# Altium PCB AICat V1.7 双面板 板厚1.6mm.PcbDoc (part 3 of 6)
Units mil, origin at the board's own origin, x right, y up, seen from the top; angles counter-clockwise.
Board outline 2778 x 2104 mil, 2 copper layers (Top Layer, Bottom Layer); 123 components, 84 nets, 332 pads, 255 vias.
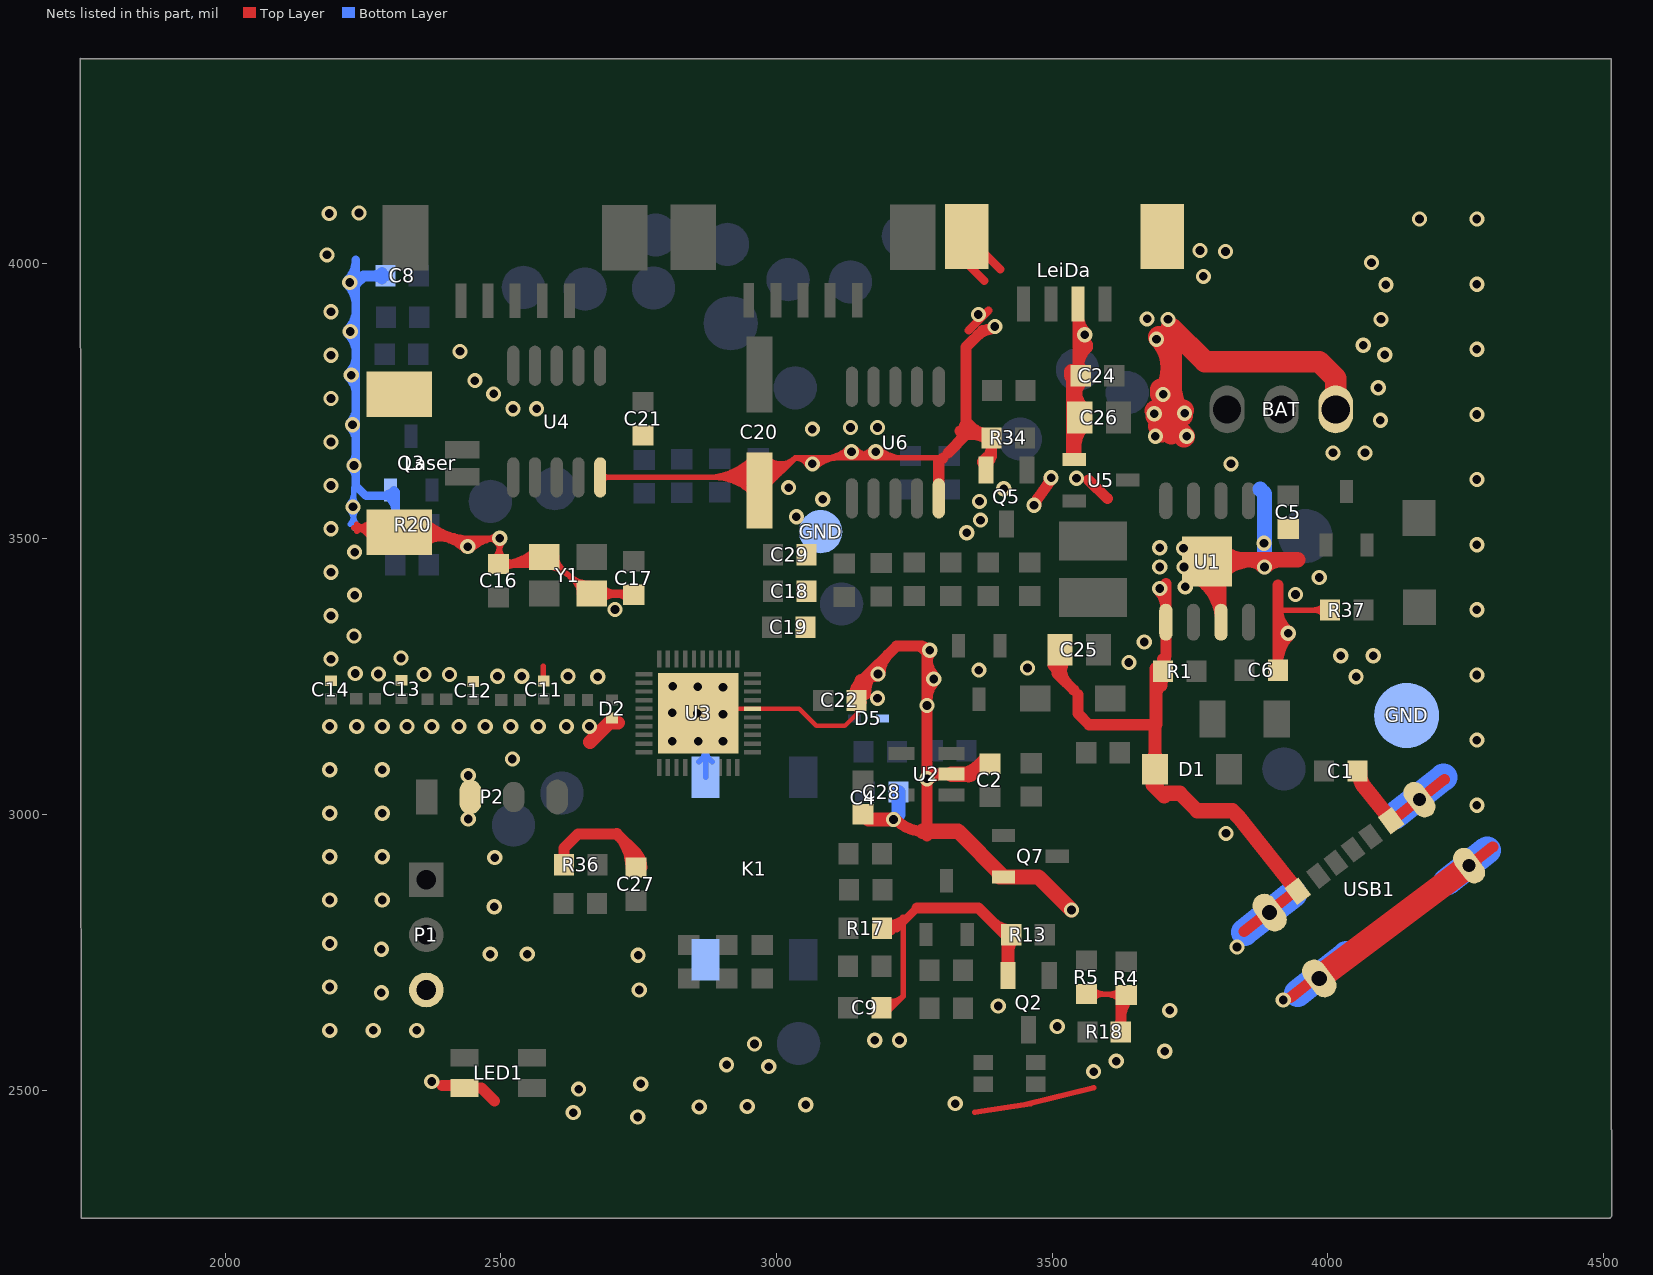
[diagram p3: the nets of this part, all layers, seen from the top]

## Via types
v1: diameter 27.56, hole 15.75, Top Layer to Bottom Layer, tented both sides, 255 vias

## Nets (pads, with @x,y where several pads share a name; then routed paths per layer and width w, separated by ;. In a path a pad name is that pad's centre, name@x,y a point inside that pad or via, vN(x,y) a via of type N, cw(c..) or ccw(c..) an arc to the next point about the centre after c; other vN are vias at no path point) (continued)
GND: BAT.1 C1.1 C2.1 C4.1 C5.2 C6.1 C8.2 C9.1 C11.1 C12.1 C13.1 C14.1 C16.1 C17.1 C18.2 C19.2 C20.2 C21.1 C22.1 C24.1 C25.2 C26.2 C27.1 C28.1 C29.1 D1.1 D2.2 D5.2 GND.1 K1.1 K1.2 Laser.3 Laser.4 LED1.1 LeiDa.2 LeiDa.5 LeiDa.6 P1.4 P2.2 Q2.2 Q3.2 Q5.2 Q7.2 R1.1 R4.2 R5.2 R13.1 R17.2 R18.1 R20.1 R34.1 R36.2 R37.1 U1.1 U1.3 U1.9 U2.2 U3.16 U3.41 U4.5 U5.1 U6.5 USB1.7 USB1.A12 USB1.B12 Y1.2 Y1.4 | length 31279.2
  Top Layer w8: U3.41@2925.8,3188.59 2928.99,3191.78 U3.16@2956.55,3191.78 3041.22,3191.78 3072,3161 3124,3161 3146.65,3183.65 3146.65,3202.34 C22.1@3151.32,3207 ; C22.1@3141.34,3195.76 cw(c3129.08,3183.17) 3146.65,3183.17 cw(c3155.58,3183.17) C22.1@3153.94,3191.95 ; C22.1@3153.32,3217 C22.1@3153.32,3192.32 ; 3146.65,3183.61 ccw(c3137.1,3183.61) 3140.39,3192.58 cw(c3137.1,3183.61) 3146.65,3183.61 ; 3146.65,3183.61 cw(c3158.18,3183.61) 3152.44,3193.61 ccw(c3158.18,3183.61) 3146.65,3183.61 ; C22.1@3153.32,3192.32 cw(c3165.79,3192.32) 3159.98,3203.36 ccw(c3165.79,3192.32) C22.1@3153.32,3192.32 ; C22.1@3153.32,3192.32 ccw(c3140.84,3192.32) 3146.65,3203.36 cw(c3140.84,3192.32) C22.1@3153.32,3192.32
  Top Layer w10: 2382.59,3501 cw(c2382.59,3428.59) v1@2433.79,3479.79 ; 2406.73,3501 cw(c2406.73,3452.73) v1@2440.86,3486.86 ; 2430.88,3501 cw(c2430.88,3476.88) v1@2447.93,3493.93 ; v1@2432.07,3493.93 cw(c2449.12,3476.88) 2449.12,3501 ; v1@2439.14,3486.86 cw(c2473.27,3452.73) 2473.27,3501 ; v1@2446.21,3479.79 cw(c2497.41,3428.59) v1@2497.41,3501 ; C16.1@2496,3454.32 2498,3456.32 v1(2498,3501) 2326.92,3501 Laser.4@2315.91,3512.01 2307.92,3520 2233,3520 ; C11.1@2577.43,3242.54 2577.43,3269.12 ; Y1.4@2578.56,3467.55 2589.45,3467.55 2656.38,3400.62 Y1.2@2665.18,3400.62 ; U4.5@2680.2,3611.52 2953.25,3611.52 2968.9,3595.86 2982.86,3595.86 3034,3647 ; C9.1@3206,2647 3230,2671 ; 3230,2805.84 3230,2671 ; 3311.14,3656.14 3302,3647 3034,3647 ; 3359.4,2460.2 3460.85,2475.65 ; 3453.3,2474.6 3575.1,2504.6 ; R5.2@3562,2674.68 3632,2674.68 R4.2@3634,2672.68 ; 3909.32,3370 3910.32,3371 R37.1@4003.69,3371 ; 2233,3520 cw(c2233,3486.23) Laser.4@2264.4,3498.65 ; 2233,3520 ccw(c2233,3572.81) Laser.4@2271.62,3536.79 ; 2233,3520 cw(c2233,3486.23) Laser.4@2264.4,3498.65 ; 2233,3520 ccw(c2233,3572.81) Laser.4@2271.62,3536.79 ; 2233,3520 ccw(c2233,3572.81) Laser.4@2271.62,3536.79 ; 2233,3520 cw(c2233,3486.23) Laser.4@2264.4,3498.65 ; 2233,3520 ccw(c2233,3572.81) Laser.4@2271.62,3536.79 ; 2233,3520 cw(c2233,3486.23) Laser.4@2264.4,3498.65 ; 2233,3520 ccw(c2233,3572.81) Laser.4@2271.62,3536.79 ; 2233,3520 cw(c2233,3486.23) Laser.4@2264.4,3498.65 ; 2247.71,3520 cw(c2247.71,3492.05) Laser.4@2273.7,3502.32 ; 2247.71,3520 cw(c2247.71,3492.05) Laser.4@2273.7,3502.32 ; 2247.71,3520 cw(c2247.71,3492.05) Laser.4@2273.7,3502.32 ; 2247.71,3520 cw(c2247.71,3492.05) Laser.4@2273.7,3502.32 ; 2247.71,3520 cw(c2247.71,3492.05) Laser.4@2273.7,3502.32 ; 2254.2,3520 cw(c2254.2,3541.2) 2239.21,3526.21 ccw(c2254.2,3541.2) 2254.2,3520 ; 2254.2,3520 ccw(c2254.2,3498.8) 2239.21,3513.79 cw(c2254.2,3498.8) 2254.2,3520 ; 2256.01,3520 ccw(c2256.01,3551.36) Laser.4@2278.94,3529.97 ; 2256.01,3520 ccw(c2256.01,3551.36) Laser.4@2278.94,3529.97 ; 2256.01,3520 ccw(c2256.01,3551.36) Laser.4@2278.94,3529.97 ; 2256.01,3520 ccw(c2256.01,3551.36) Laser.4@2278.94,3529.97 ; 2256.01,3520 ccw(c2256.01,3551.36) Laser.4@2278.94,3529.97 ; Laser.4@2338.11,3516.49 ccw(c2375.5,3553.88) 2375.5,3501 ; Laser.4@2338.11,3516.49 ccw(c2375.5,3553.88) 2375.5,3501 ; Laser.4@2338.11,3516.49 ccw(c2375.5,3553.88) 2375.5,3501 ; Laser.4@2338.11,3516.49 ccw(c2375.5,3553.88) 2375.5,3501 ; Laser.4@2338.11,3516.49 ccw(c2375.5,3553.88) 2375.5,3501 ; Laser.4@2345.18,3523.56 ccw(c2399.64,3578.02) 2399.64,3501 ; Laser.4@2345.18,3523.56 ccw(c2399.64,3578.02) 2399.64,3501 ; Laser.4@2345.18,3523.56 ccw(c2399.64,3578.02) 2399.64,3501 ; Laser.4@2345.18,3523.56 ccw(c2399.64,3578.02) 2399.64,3501 ; Laser.4@2345.18,3523.56 ccw(c2399.64,3578.02) 2399.64,3501 ; Laser.4@2352.26,3530.63 ccw(c2423.79,3602.16) 2423.79,3501 ; Laser.4@2352.26,3530.63 ccw(c2423.79,3602.16) 2423.79,3501 ; Laser.4@2352.26,3530.63 ccw(c2423.79,3602.16) 2423.79,3501 ; Laser.4@2352.26,3530.63 ccw(c2423.79,3602.16) 2423.79,3501 ; Laser.4@2352.26,3530.63 ccw(c2423.79,3602.16) 2423.79,3501 ; Laser.4@2359.33,3486.31 cw(c2394.79,3450.84) 2394.79,3501 ; Laser.4@2359.33,3486.31 cw(c2394.79,3450.84) 2394.79,3501 ; Laser.4@2359.33,3486.31 cw(c2394.79,3450.84) 2394.79,3501 ; Laser.4@2359.33,3486.31 cw(c2394.79,3450.84) 2394.79,3501 ; Laser.4@2359.33,3486.31 cw(c2394.79,3450.84) 2394.79,3501 ; Laser.4@2359.33,3537.7 ccw(c2447.93,3626.3) 2447.93,3501 ; Laser.4@2359.33,3537.7 ccw(c2447.93,3626.3) 2447.93,3501 ; Laser.4@2359.33,3537.7 ccw(c2447.93,3626.3) 2447.93,3501 ; Laser.4@2359.33,3537.7 ccw(c2447.93,3626.3) 2447.93,3501 ; Laser.4@2359.33,3537.7 ccw(c2447.93,3626.3) 2447.93,3501 ; 2476.8,3501 cw(c2476.8,3479.8) v1@2491.79,3494.79 ; 2476.8,3501 ccw(c2476.8,3522.2) v1@2491.79,3507.21 ; 2476.8,3501 cw(c2476.8,3479.8) v1@2491.79,3494.79 ; 2476.8,3501 ccw(c2476.8,3522.2) v1@2491.79,3507.21 ; 2476.8,3501 ccw(c2476.8,3522.2) v1@2491.79,3507.21 ; 2476.8,3501 cw(c2476.8,3479.8) v1@2491.79,3494.79 ; 2476.8,3501 ccw(c2476.8,3522.2) v1@2491.79,3507.21 ; 2476.8,3501 cw(c2476.8,3479.8) v1@2491.79,3494.79 ; 2476.8,3501 ccw(c2476.8,3522.2) v1@2491.79,3507.21 ; 2476.8,3501 cw(c2476.8,3479.8) v1@2491.79,3494.79 ; C16.1@2487.57,3463.73 ccw(c2462.41,3488.89) v1@2498,3488.89 ; C16.1@2487.57,3463.73 ccw(c2462.41,3488.89) v1@2498,3488.89 ; C16.1@2487.57,3463.73 ccw(c2462.41,3488.89) v1@2498,3488.89 ; C16.1@2487.57,3463.73 ccw(c2462.41,3488.89) v1@2498,3488.89 ; C16.1@2487.57,3463.73 ccw(c2462.41,3488.89) v1@2498,3488.89 ; v1@2491.79,3494.79 cw(c2476.8,3479.8) 2498,3479.8 ; v1@2491.79,3494.79 cw(c2476.8,3479.8) 2498,3479.8 ; v1@2491.79,3494.79 cw(c2476.8,3479.8) 2498,3479.8 ; v1@2491.79,3494.79 cw(c2476.8,3479.8) 2498,3479.8 ; v1@2491.79,3494.79 cw(c2476.8,3479.8) 2498,3479.8 ; 2498,3479.8 cw(c2519.2,3479.8) v1@2504.21,3494.79 ; 2498,3479.8 cw(c2519.2,3479.8) v1@2504.21,3494.79 ; 2498,3479.8 cw(c2519.2,3479.8) v1@2504.21,3494.79 ; 2498,3479.8 cw(c2519.2,3479.8) v1@2504.21,3494.79 ; 2498,3479.8 cw(c2519.2,3479.8) v1@2504.21,3494.79 ; 2498,3483.99 ccw(c2526.66,3483.99) C16.1@2506.39,3463.73 ; 2498,3483.99 ccw(c2526.66,3483.99) C16.1@2506.39,3463.73 ; 2498,3483.99 ccw(c2526.66,3483.99) C16.1@2506.39,3463.73 ; 2498,3483.99 ccw(c2526.66,3483.99) C16.1@2506.39,3463.73 ; 2498,3483.99 ccw(c2526.66,3483.99) C16.1@2506.39,3463.73 ; Y1.4@2582.49,3448.93 cw(c2582.49,3387.16) 2626.16,3430.84 ; Y1.4@2582.49,3448.93 cw(c2582.49,3387.16) 2626.16,3430.84 ; Y1.4@2582.49,3448.93 cw(c2582.49,3387.16) 2626.16,3430.84 ; Y1.4@2582.49,3448.93 cw(c2582.49,3387.16) 2626.16,3430.84 ; Y1.4@2582.49,3448.93 cw(c2582.49,3387.16) 2626.16,3430.84 ; Y1.4@2582.49,3458.93 cw(c2582.49,3421.31) 2609.09,3447.91 ; Y1.4@2582.49,3458.93 cw(c2582.49,3421.31) 2609.09,3447.91 ; Y1.4@2582.49,3458.93 cw(c2582.49,3421.31) 2609.09,3447.91 ; Y1.4@2582.49,3458.93 cw(c2582.49,3421.31) 2609.09,3447.91 ; Y1.4@2582.49,3458.93 cw(c2582.49,3421.31) 2609.09,3447.91 ; Y1.4@2601.12,3467.55 ccw(c2629.27,3467.55) 2609.36,3447.64 ; Y1.4@2601.12,3467.55 ccw(c2629.27,3467.55) 2609.36,3447.64 ; Y1.4@2601.12,3467.55 ccw(c2629.27,3467.55) 2609.36,3447.64 ; Y1.4@2601.12,3467.55 ccw(c2629.27,3467.55) 2609.36,3447.64 ; Y1.4@2601.12,3467.55 ccw(c2629.27,3467.55) 2609.36,3447.64 ; 2621.16,3435.84 ccw(c2661.24,3475.92) Y1.2@2661.24,3419.24 ; 2621.16,3435.84 ccw(c2661.24,3475.92) Y1.2@2661.24,3419.24 ; 2621.16,3435.84 ccw(c2661.24,3475.92) Y1.2@2661.24,3419.24 ; 2621.16,3435.84 ccw(c2661.24,3475.92) Y1.2@2661.24,3419.24 ; 2621.16,3435.84 ccw(c2661.24,3475.92) Y1.2@2661.24,3419.24 ; 2632.88,3424.12 cw(c2609.38,3400.62) Y1.2@2642.62,3400.62 ; 2632.88,3424.12 cw(c2609.38,3400.62) Y1.2@2642.62,3400.62 ; 2632.88,3424.12 cw(c2609.38,3400.62) Y1.2@2642.62,3400.62 ; 2632.88,3424.12 cw(c2609.38,3400.62) Y1.2@2642.62,3400.62 ; 2632.88,3424.12 cw(c2609.38,3400.62) Y1.2@2642.62,3400.62 ; Y1.2@2638.23,3418.77 ccw(c2661.24,3441.78) Y1.2@2661.24,3409.24 ; Y1.2@2638.23,3418.77 ccw(c2661.24,3441.78) Y1.2@2661.24,3409.24 ; Y1.2@2638.23,3418.77 ccw(c2661.24,3441.78) Y1.2@2661.24,3409.24 ; Y1.2@2638.23,3418.77 ccw(c2661.24,3441.78) Y1.2@2661.24,3409.24 ; Y1.2@2638.23,3418.77 ccw(c2661.24,3441.78) Y1.2@2661.24,3409.24 ; U4.5@2684.46,3607.26 cw(c2694.74,3596.97) 2694.74,3611.52 ; U4.5@2684.46,3607.26 cw(c2694.74,3596.97) 2694.74,3611.52 ; U4.5@2684.46,3607.26 cw(c2694.74,3596.97) 2694.74,3611.52 ; U4.5@2684.46,3607.26 cw(c2694.74,3596.97) 2694.74,3611.52 ; U4.5@2684.46,3607.26 cw(c2694.74,3596.97) 2694.74,3611.52 ; U4.5@2684.46,3615.77 ccw(c2694.74,3626.06) 2694.74,3611.52 ; U4.5@2684.46,3615.77 ccw(c2694.74,3626.06) 2694.74,3611.52 ; U4.5@2684.46,3615.77 ccw(c2694.74,3626.06) 2694.74,3611.52 ; U4.5@2684.46,3615.77 ccw(c2694.74,3626.06) 2694.74,3611.52 ; U4.5@2684.46,3615.77 ccw(c2694.74,3626.06) 2694.74,3611.52 ; 2886.15,3611.52 cw(c2886.15,3513.12) C20.2@2955.73,3582.69 ; 2886.15,3611.52 cw(c2886.15,3513.12) C20.2@2955.73,3582.69 ; 2886.15,3611.52 cw(c2886.15,3513.12) C20.2@2955.73,3582.69 ; 2910.3,3611.52 cw(c2910.3,3537.26) C20.2@2962.8,3589.77 ; 2910.3,3611.52 cw(c2910.3,3537.26) C20.2@2962.8,3589.77 ; 2910.3,3611.52 cw(c2910.3,3537.26) C20.2@2962.8,3589.77 ; 2934.44,3611.52 cw(c2934.44,3561.4) C20.2@2969.87,3596.84 ; 2934.44,3611.52 cw(c2934.44,3561.4) C20.2@2969.87,3596.84 ; 2934.44,3611.52 cw(c2934.44,3561.4) C20.2@2969.87,3596.84 ; 3034,3647 cw(c3034,3621.6) v1@3057.04,3632.3 ; 3034,3647 cw(c3034,3621.6) v1@3057.04,3632.3 ; 3034,3647 cw(c3007.68,3673.32) 2981.83,3646.54 ccw(c3007.68,3673.32) 3034,3647 ; 3034,3647 cw(c3034,3621.6) v1@3057.04,3632.3 ; 3034,3647 cw(c3034,3621.6) v1@3057.04,3632.3 ; 3049.67,3647 cw(c3049.67,3628.88) v1@3066.11,3636.51 ; 3049.67,3647 cw(c3049.67,3628.88) v1@3066.11,3636.51 ; 3049.67,3647 cw(c3049.67,3628.88) v1@3066.11,3636.51 ; 3049.67,3647 cw(c3049.67,3628.88) v1@3066.11,3636.51 ; v1@3064.14,3636.86 cw(c3088.61,3612.39) 3088.61,3647 ; v1@3064.14,3636.86 cw(c3088.61,3612.39) 3088.61,3647 ; v1@3064.14,3636.86 cw(c3088.61,3612.39) 3088.61,3647 ; v1@3064.14,3636.86 cw(c3088.61,3612.39) 3088.61,3647 ; v1@3071.21,3629.79 cw(c3112.75,3588.25) 3112.75,3647 ; v1@3071.21,3629.79 cw(c3112.75,3588.25) 3112.75,3647 ; v1@3071.21,3629.79 cw(c3112.75,3588.25) 3112.75,3647 ; v1@3071.21,3629.79 cw(c3112.75,3588.25) 3112.75,3647 ; 3088.25,3647 ccw(c3088.25,3705.75) v1@3129.79,3664.21 ; 3088.25,3647 ccw(c3088.25,3705.75) v1@3129.79,3664.21 ; 3088.25,3647 ccw(c3088.25,3705.75) v1@3129.79,3664.21 ; 3088.25,3647 ccw(c3088.25,3705.75) v1@3129.79,3664.21 ; 3112.39,3647 ccw(c3112.39,3681.61) v1@3136.86,3657.14 ; 3112.39,3647 ccw(c3112.39,3681.61) v1@3136.86,3657.14 ; 3112.39,3647 ccw(c3112.39,3681.61) v1@3136.86,3657.14 ; 3112.39,3647 ccw(c3112.39,3681.61) v1@3136.86,3657.14 ; v1@3132.25,3647 ccw(c3132.25,3705.75) v1@3173.79,3664.21 ; v1@3132.25,3647 ccw(c3132.25,3705.75) v1@3173.79,3664.21 ; v1@3132.25,3647 ccw(c3132.25,3705.75) v1@3173.79,3664.21 ; v1@3132.25,3647 ccw(c3132.25,3705.75) v1@3173.79,3664.21 ; v1@3135.14,3657.14 ccw(c3159.61,3681.61) 3159.61,3647 ; v1@3135.14,3657.14 ccw(c3159.61,3681.61) 3159.61,3647 ; v1@3135.14,3657.14 ccw(c3159.61,3681.61) 3159.61,3647 ; v1@3135.14,3657.14 ccw(c3159.61,3681.61) 3159.61,3647 ; v1@3142.21,3664.21 ccw(c3183.75,3705.75) v1@3183.75,3647 ; v1@3142.21,3664.21 ccw(c3183.75,3705.75) v1@3183.75,3647 ; v1@3142.21,3664.21 ccw(c3183.75,3705.75) v1@3183.75,3647 ; v1@3142.21,3664.21 ccw(c3183.75,3705.75) v1@3183.75,3647 ; 3156.39,3647 ccw(c3156.39,3681.61) v1@3180.86,3657.14 ; 3156.39,3647 ccw(c3156.39,3681.61) v1@3180.86,3657.14 ; 3156.39,3647 ccw(c3156.39,3681.61) v1@3180.86,3657.14 ; 3156.39,3647 ccw(c3156.39,3681.61) v1@3180.86,3657.14 ; v1@3179.14,3657.14 ccw(c3203.61,3681.61) 3203.61,3647 ; v1@3179.14,3657.14 ccw(c3203.61,3681.61) 3203.61,3647 ; v1@3179.14,3657.14 ccw(c3203.61,3681.61) 3203.61,3647 ; v1@3179.14,3657.14 ccw(c3203.61,3681.61) 3203.61,3647 ; v1@3186.21,3664.21 ccw(c3227.75,3705.75) 3227.75,3647 ; v1@3186.21,3664.21 ccw(c3227.75,3705.75) 3227.75,3647 ; v1@3186.21,3664.21 ccw(c3227.75,3705.75) 3227.75,3647 ; v1@3186.21,3664.21 ccw(c3227.75,3705.75) 3227.75,3647 ; 3230,2671 cw(c3202.84,2698.15) 3193.54,2660.89 ccw(c3202.84,2698.15) 3230,2671 ; 3230,2671 cw(c3205.47,2695.53) 3194.52,2662.61 ccw(c3205.47,2695.53) 3230,2671 ; R5.2@3572.39,2665.27 cw(c3595.11,2642.56) 3595.11,2674.68 ; R5.2@3572.39,2665.27 cw(c3595.11,2642.56) 3595.11,2674.68 ; R5.2@3572.39,2665.27 cw(c3595.11,2642.56) 3595.11,2674.68 ; R5.2@3572.39,2665.27 cw(c3595.11,2642.56) 3595.11,2674.68 ; R5.2@3572.39,2665.27 cw(c3595.11,2642.56) 3595.11,2674.68 ; R5.2@3572.39,2684.09 ccw(c3595.11,2706.81) 3595.11,2674.68 ; R5.2@3572.39,2684.09 ccw(c3595.11,2706.81) 3595.11,2674.68 ; R5.2@3572.39,2684.09 ccw(c3595.11,2706.81) 3595.11,2674.68 ; R5.2@3572.39,2684.09 ccw(c3595.11,2706.81) 3595.11,2674.68 ; R5.2@3572.39,2684.09 ccw(c3595.11,2706.81) 3595.11,2674.68 ; 3596.06,2674.68 cw(c3596.06,2635.73) R4.2@3623.61,2663.27 ; 3596.06,2674.68 cw(c3596.06,2635.73) R4.2@3623.61,2663.27 ; 3596.06,2674.68 cw(c3596.06,2635.73) R4.2@3623.61,2663.27 ; 3596.06,2674.68 cw(c3596.06,2635.73) R4.2@3623.61,2663.27 ; 3596.06,2674.68 cw(c3596.06,2635.73) R4.2@3623.61,2663.27 ; 3605.72,2674.68 ccw(c3605.72,2699.98) R4.2@3623.61,2682.09 ; 3605.72,2674.68 ccw(c3605.72,2699.98) R4.2@3623.61,2682.09 ; 3605.72,2674.68 ccw(c3605.72,2699.98) R4.2@3623.61,2682.09 ; 3605.72,2674.68 ccw(c3605.72,2699.98) R4.2@3623.61,2682.09 ; 3605.72,2674.68 ccw(c3605.72,2699.98) R4.2@3623.61,2682.09 ; 3971.56,3371 cw(c3971.56,3338.87) R37.1@3994.28,3361.59 ; 3971.56,3371 ccw(c3971.56,3403.13) R37.1@3994.28,3380.41 ; 3971.56,3371 ccw(c3971.56,3403.13) R37.1@3994.28,3380.41 ; 3971.56,3371 cw(c3971.56,3338.87) R37.1@3994.28,3361.59 ; 3971.56,3371 ccw(c3971.56,3403.13) R37.1@3994.28,3380.41 ; 3971.56,3371 cw(c3971.56,3338.87) R37.1@3994.28,3361.59 ; 2871.74,3611.52 ccw(c2871.74,3730.3) 2955.73,3646.31 cw(c2871.74,3730.3) 2871.74,3611.52 ; 2895.88,3611.52 ccw(c2895.88,3706.15) 2962.8,3639.23 cw(c2895.88,3706.15) 2895.88,3611.52 ; 2920.03,3611.52 ccw(c2920.03,3682.01) 2969.87,3632.16 cw(c2920.03,3682.01) 2920.03,3611.52 ; 2944.17,3611.52 ccw(c2944.17,3657.87) 2976.95,3625.09 cw(c2944.17,3657.87) 2944.17,3611.52 ; C20.2@2947.11,3610.56 ccw(c2972.33,3636.69) 2998.01,3611.01 cw(c2972.33,3636.69) C20.2@2947.11,3610.56 ; C20.2@2954.05,3617.76 ccw(c2979.4,3644.02) 3005.21,3618.21 cw(c2979.4,3644.02) C20.2@2954.05,3617.76 ; C20.2@2961,3624.95 ccw(c2986.47,3651.34) 3012.41,3625.41 cw(c2986.47,3651.34) C20.2@2961,3624.95 ; C20.2@2967.94,3632.15 ccw(c2993.54,3658.67) 3019.6,3632.6 cw(c2993.54,3658.67) C20.2@2967.94,3632.15 ; C20.2@2974.89,3639.34 ccw(c3000.61,3665.99) 3026.8,3639.8 cw(c3000.61,3665.99) C20.2@2974.89,3639.34 ; C9.1@3191.12,2651.19 ccw(c3197.85,2678.16) 3217.51,2658.51 cw(c3197.85,2678.16) C9.1@3191.12,2651.19 ; C9.1@3191.36,2653.12 ccw(c3199.75,2678.35) 3218.55,2659.55 cw(c3199.75,2678.35) C9.1@3191.36,2653.12
  Top Layer w15: C16.1@2496,3454.32 2565.32,3454.32 Y1.4@2578.56,3467.55 ; Y1.2@2665.18,3400.62 2739.07,3400.62 C17.1@2741,3398.68 ; R17.2@3191.32,2794 3218.16,2794 3230,2805.84 3255.16,2831 ; LeiDa.6@3340.6,4004.1 3376.6,3968.1 ; 3348.4,3878 3384.4,3914 ; LeiDa.6@3369.6,4025.1 3405.6,3989.1 ; C25.2@3508.96,3280 C25.2@3508.96,3287 ; C16.1@2503.75,3454.32 ccw(c2503.75,3538.41) Y1.4@2563.22,3478.95 ; C16.1@2503.75,3454.32 ccw(c2503.75,3538.41) Y1.4@2563.22,3478.95 ; C16.1@2503.75,3454.32 ccw(c2503.75,3538.41) Y1.4@2563.22,3478.95 ; C16.1@2503.75,3454.32 ccw(c2503.75,3538.41) Y1.4@2563.22,3478.95 ; C16.1@2503.75,3454.32 ccw(c2503.75,3538.41) Y1.4@2563.22,3478.95 ; C16.1@2504.63,3446.67 cw(c2523.07,3428.23) 2523.07,3454.32 ; C16.1@2504.63,3446.67 cw(c2523.07,3428.23) 2523.07,3454.32 ; C16.1@2504.63,3446.67 cw(c2523.07,3428.23) 2523.07,3454.32 ; C16.1@2504.63,3446.67 cw(c2523.07,3428.23) 2523.07,3454.32 ; C16.1@2504.63,3446.67 cw(c2523.07,3428.23) 2523.07,3454.32 ; C16.1@2504.63,3461.96 ccw(c2523.07,3480.41) 2523.07,3454.32 ; C16.1@2504.63,3461.96 ccw(c2523.07,3480.41) 2523.07,3454.32 ; C16.1@2504.63,3461.96 ccw(c2523.07,3480.41) 2523.07,3454.32 ; C16.1@2504.63,3461.96 ccw(c2523.07,3480.41) 2523.07,3454.32 ; C16.1@2504.63,3461.96 ccw(c2523.07,3480.41) 2523.07,3454.32 ; 2539.97,3454.32 ccw(c2539.97,3502.2) Y1.4@2573.83,3468.34 ; 2539.97,3454.32 ccw(c2539.97,3502.2) Y1.4@2573.83,3468.34 ; 2539.97,3454.32 ccw(c2539.97,3502.2) Y1.4@2573.83,3468.34 ; 2539.97,3454.32 ccw(c2539.97,3502.2) Y1.4@2573.83,3468.34 ; 2539.97,3454.32 ccw(c2539.97,3502.2) Y1.4@2573.83,3468.34 ; Y1.2@2680.51,3389.22 cw(c2708.03,3361.7) 2708.03,3400.62 ; Y1.2@2680.51,3389.22 cw(c2708.03,3361.7) 2708.03,3400.62 ; Y1.2@2680.51,3389.22 cw(c2708.03,3361.7) 2708.03,3400.62 ; Y1.2@2680.51,3389.22 cw(c2708.03,3361.7) 2708.03,3400.62 ; Y1.2@2680.51,3389.22 cw(c2708.03,3361.7) 2708.03,3400.62 ; Y1.2@2680.51,3412.02 ccw(c2708.03,3439.54) 2708.03,3400.62 ; Y1.2@2680.51,3412.02 ccw(c2708.03,3439.54) 2708.03,3400.62 ; Y1.2@2680.51,3412.02 ccw(c2708.03,3439.54) 2708.03,3400.62 ; Y1.2@2680.51,3412.02 ccw(c2708.03,3439.54) 2708.03,3400.62 ; Y1.2@2680.51,3412.02 ccw(c2708.03,3439.54) 2708.03,3400.62 ; 2709.26,3400.62 cw(c2709.26,3367.93) C17.1@2732.37,3391.04 ; 2709.26,3400.62 cw(c2709.26,3367.93) C17.1@2732.37,3391.04 ; 2709.26,3400.62 cw(c2709.26,3367.93) C17.1@2732.37,3391.04 ; 2709.26,3400.62 cw(c2709.26,3367.93) C17.1@2732.37,3391.04 ; 2709.26,3400.62 cw(c2709.26,3367.93) C17.1@2732.37,3391.04 ; 2718.59,3400.62 ccw(c2718.59,3420.11) C17.1@2732.37,3406.33 ; 2718.59,3400.62 ccw(c2718.59,3420.11) C17.1@2732.37,3406.33 ; 2718.59,3400.62 ccw(c2718.59,3420.11) C17.1@2732.37,3406.33 ; 2718.59,3400.62 ccw(c2718.59,3420.11) C17.1@2732.37,3406.33 ; 2718.59,3400.62 ccw(c2718.59,3420.11) C17.1@2732.37,3406.33 ; 3229.47,2811.47 cw(c3204.16,2836.78) 3194.29,2802.37 ccw(c3204.16,2836.78) 3229.47,2811.47 ; 3229.47,2811.47 cw(c3206.6,2834.34) 3195.14,2804.09 ccw(c3206.6,2834.34) 3229.47,2811.47 ; R17.2@3189.83,2790.06 ccw(c3197.58,2810.53) 3213.05,2795.05 cw(c3197.58,2810.53) R17.2@3189.83,2790.06 ; R17.2@3190.16,2787.95 ccw(c3196.14,2808.79) 3211.46,2793.46 cw(c3196.14,2808.79) R17.2@3190.16,2787.95
  Top Layer w20: 2393.84,2509.13 2429.43,2509.13 LED1.1@2434.43,2504.13 2464.97,2504.13 2488.6,2480.5 ; R36.2@2614.68,2909 2614.68,2939.68 2640,2965 2711,2965 2745,2931 C27.1@2745,2904.32 ; 3153.32,3243.32 3155.32,3243.32 3218,3306 3261,3306 ; R17.2@3191.32,2791 R17.2@3207,2791 ; 3255.16,2831 3366,2831 3415,2782 R13.1@3425.69,2782 ; 3273,2961 3273,2969.96 3273,2978 ; 3274,2979 3273,2978 ; v1@3274,3075 v1@3276,3073 ; v1@3276.33,3073.33 U2.2@3317.17,3073.33 ; U6.5@3294.2,3573.52 3294.2,3639.2 3302,3647 ; 3311.14,3656.14 3344,3689 ; 3374,3878 3344,3848 3344,3689 ; Q5.2@3379.6,3629.21 3379.6,3641.21 3389.69,3651.3 ; 3474,3574 v1@3497,3606 ; C25.2@3508.96,3287 3508.96,3256.04 ; C25.2@3520.48,3275.23 ccw(c3549.23,3261.09) 3526.57,3238.43 ; 3539,3226 3508.96,3256.04 ; 3546.61,3830.95 cw(c3598.05,3830.95) v1@3561.67,3867.33 ; 3546.61,3860.76 ccw(c3549.76,3860.76) 3547.53,3858.53 ; 3546.61,3879.24 cw(c3549.76,3879.24) 3547.53,3881.47 ; LeiDa.2@3546.61,3909.05 ccw(c3598.05,3909.05) v1@3561.67,3872.67 ; LeiDa.2@3546.61,3929.98 3546.61,3801.08 C24.1@3551.68,3796 ; 3547,3218 3547,3183 3567,3163 3688,3163 ; 3566.08,3606.82 3600.08,3572.82 ; R18.1@3624.31,2606 3624.31,2663 R4.2@3634,2672.68 ; 3700.37,3282 3706,3287.63 ; U1.1@3706,3372 U1.1@3706,3349 ; 3706,3419 U1.1@3706,3349 ; U1.9@3781,3459 3806,3434 U1.3@3806,3349 ; 3847.55,2787.89 USB1.B12@3935.6,2857.4 ; C6.1@3909.32,3262 3909.32,3370 ; 3909.32,3416.32 3909.32,3370 ; v1@3932.02,2668.23 4020.07,2737.73 ; USB1.A12@4123.61,2994.53 4211.66,3064.03 ; 4210.7,2871.98 4298.75,2941.48 ; R36.2@2608.81,2915.86 ccw(c2594.63,2930.04) 2614.68,2930.04 ; R36.2@2608.81,2915.86 ccw(c2594.63,2930.04) 2614.68,2930.04 ; R36.2@2608.81,2915.86 ccw(c2594.63,2930.04) 2614.68,2930.04 ; R36.2@2608.81,2915.86 ccw(c2594.63,2930.04) 2614.68,2930.04 ; 2614.68,2930.04 ccw(c2634.74,2930.04) R36.2@2620.56,2915.86 ; 2614.68,2930.04 ccw(c2634.74,2930.04) R36.2@2620.56,2915.86 ; 2614.68,2930.04 ccw(c2634.74,2930.04) R36.2@2620.56,2915.86 ; 2614.68,2930.04 ccw(c2634.74,2930.04) R36.2@2620.56,2915.86 ; 2710.27,2965.73 cw(c2648.86,2904.32) C27.1@2735.71,2904.32 ; 2710.27,2965.73 cw(c2648.86,2904.32) C27.1@2735.71,2904.32 ; 2710.27,2965.73 cw(c2648.86,2904.32) C27.1@2735.71,2904.32 ; 2710.27,2965.73 cw(c2648.86,2904.32) C27.1@2735.71,2904.32 ; C27.1@2739.13,2910.19 ccw(c2724.94,2924.37) 2745,2924.37 ; C27.1@2739.13,2910.19 ccw(c2724.94,2924.37) 2745,2924.37 ; C27.1@2739.13,2910.19 ccw(c2724.94,2924.37) 2745,2924.37 ; C27.1@2739.13,2910.19 ccw(c2724.94,2924.37) 2745,2924.37 ; 2744.41,2931.59 cw(c2717.14,2904.32) C27.1@2755.71,2904.32 ; 2744.41,2931.59 cw(c2717.14,2904.32) C27.1@2755.71,2904.32 ; 2744.41,2931.59 cw(c2717.14,2904.32) C27.1@2755.71,2904.32 ; 2744.41,2931.59 cw(c2717.14,2904.32) C27.1@2755.71,2904.32 ; 2745,2924.37 ccw(c2765.06,2924.37) C27.1@2750.87,2910.19 ; 2745,2924.37 ccw(c2765.06,2924.37) C27.1@2750.87,2910.19 ; 2745,2924.37 ccw(c2765.06,2924.37) C27.1@2750.87,2910.19 ; 2745,2924.37 ccw(c2765.06,2924.37) C27.1@2750.87,2910.19 ; 3249.56,3306 cw(c3249.56,3269.56) v1@3275.33,3295.33 ; 3249.56,3306 cw(c3249.56,3269.56) v1@3275.33,3295.33 ; 3249.56,3306 cw(c3249.56,3269.56) v1@3275.33,3295.33 ; 3249.56,3306 cw(c3249.56,3269.56) v1@3275.33,3295.33 ; 3261,3306 cw(c3261,3291.62) v1@3274.46,3296.67 ; 3261,3306 cw(c3261,3291.62) v1@3274.46,3296.67 ; 3261,3306 cw(c3261,3291.62) v1@3274.46,3296.67 ; 3261,3306 cw(c3261,3291.62) v1@3274.46,3296.67 ; 3261,3306 3273,3294 v1(3273,3198) v1(3273,3065) 3273,2978 ; 3264.96,2969.96 cw(c3264.96,3035.09) 3214.9,2993.42 ccw(c3264.96,3035.09) 3264.96,2969.96 ; 3264.96,2969.96 3273,2978 ; v1@3273,3207.9 cw(c3323.1,3207.9) v1@3287.67,3243.33 ; v1@3273,3207.9 cw(c3323.1,3207.9) v1@3287.67,3243.33 ; v1@3273,3207.9 cw(c3323.1,3207.9) v1@3287.67,3243.33 ; 3273,3235.81 ccw(c3274.81,3235.81) 3273.53,3234.53 ; 3273,3235.81 ccw(c3274.81,3235.81) 3273.53,3234.53 ; 3273,3235.81 ccw(c3274.81,3235.81) 3273.53,3234.53 ; 3273,3256.19 cw(c3274.81,3256.19) 3273.53,3257.47 ; 3273,3256.19 cw(c3274.81,3256.19) 3273.53,3257.47 ; 3273,3256.19 cw(c3274.81,3256.19) 3273.53,3257.47 ; 3273,3276.8 cw(c3299.2,3276.8) v1@3280.67,3295.33 ; 3273,3276.8 cw(c3299.2,3276.8) v1@3280.67,3295.33 ; 3273,3276.8 cw(c3299.2,3276.8) v1@3280.67,3295.33 ; 3273,3276.8 cw(c3299.2,3276.8) v1@3280.67,3295.33 ; 3273,3284.1 ccw(c3323.1,3284.1) v1@3287.67,3248.67 ; 3273,3284.1 ccw(c3323.1,3284.1) v1@3287.67,3248.67 ; 3273,3284.1 ccw(c3323.1,3284.1) v1@3287.67,3248.67 ; v1@3275.67,3062.33 cw(c3302.23,3035.77) U2.2@3302.23,3073.33 ; v1@3275.67,3062.33 cw(c3302.23,3035.77) U2.2@3302.23,3073.33 ; v1@3275.67,3062.33 cw(c3302.23,3035.77) U2.2@3302.23,3073.33 ; 3327.23,3672.23 ccw(c3293.47,3706) 3341.22,3706 ; 3327.23,3672.23 ccw(c3293.47,3706) 3341.22,3706 ; 3327.23,3672.23 ccw(c3293.47,3706) 3341.22,3706 ; 3332.6,3695.55 ccw(c3346.68,3707.41) 3346.68,3689 ; 3332.6,3695.55 ccw(c3346.68,3707.41) 3346.68,3689 ; 3332.6,3695.55 ccw(c3346.68,3707.41) 3346.68,3689 ; 3344,3689 R34.1@3389.69,3689 ; 3347.89,3708.44 ccw(c3389.68,3743.65) R34.1@3389.68,3689 ; 3347.89,3708.44 ccw(c3389.68,3743.65) R34.1@3389.68,3689 ; 3347.89,3708.44 ccw(c3389.68,3743.65) R34.1@3389.68,3689 ; 3357.52,3689 cw(c3357.52,3651.82) R34.1@3383.81,3678.11 ; 3357.52,3689 cw(c3357.52,3651.82) R34.1@3383.81,3678.11 ; 3357.52,3689 cw(c3357.52,3651.82) R34.1@3383.81,3678.11 ; 3357.52,3689 cw(c3357.52,3651.82) R34.1@3383.81,3678.11 ; 3357.52,3689 cw(c3357.52,3651.82) R34.1@3383.81,3678.11 ; Q5.2@3376.93,3638.71 ccw(c3346.12,3669.52) R34.1@3389.69,3669.52 ; Q5.2@3376.93,3638.71 ccw(c3346.12,3669.52) R34.1@3389.69,3669.52 ; Q5.2@3376.93,3638.71 ccw(c3346.12,3669.52) R34.1@3389.69,3669.52 ; Q5.2@3376.93,3638.71 ccw(c3346.12,3669.52) R34.1@3389.69,3669.52 ; Q5.2@3376.93,3638.71 ccw(c3346.12,3669.52) R34.1@3389.69,3669.52 ; Q5.2@3379.24,3639.8 ccw(c3378.14,3651.3) 3389.69,3651.3 ; Q5.2@3379.24,3639.8 ccw(c3378.14,3651.3) 3389.69,3651.3 ; Q5.2@3379.24,3639.8 ccw(c3378.14,3651.3) 3389.69,3651.3 ; Q5.2@3379.24,3639.8 ccw(c3378.14,3651.3) 3389.69,3651.3 ; Q5.2@3379.24,3639.8 ccw(c3378.14,3651.3) 3389.69,3651.3 ; Q5.2@3383.38,3636.04 cw(c3404.91,3636.07) 3389.69,3651.3 ; Q5.2@3383.38,3636.04 cw(c3404.91,3636.07) 3389.69,3651.3 ; Q5.2@3383.38,3636.04 cw(c3404.91,3636.07) 3389.69,3651.3 ; Q5.2@3383.38,3636.04 cw(c3404.91,3636.07) 3389.69,3651.3 ; Q5.2@3383.38,3636.04 cw(c3404.91,3636.07) 3389.69,3651.3 ; R34.1@3383.81,3676.14 cw(c3369.63,3661.96) 3389.69,3661.96 ; R34.1@3383.81,3676.14 cw(c3369.63,3661.96) 3389.69,3661.96 ; R34.1@3383.81,3676.14 cw(c3369.63,3661.96) 3389.69,3661.96 ; R34.1@3383.81,3676.14 cw(c3369.63,3661.96) 3389.69,3661.96 ; R34.1@3383.81,3676.14 cw(c3369.63,3661.96) 3389.69,3661.96 ; 3389.69,3651.3 R34.1@3389.69,3689 ; 3389.69,3661.96 cw(c3409.74,3661.96) R34.1@3395.56,3676.14 ; 3389.69,3661.96 cw(c3409.74,3661.96) R34.1@3395.56,3676.14 ; 3389.69,3661.96 cw(c3409.74,3661.96) R34.1@3395.56,3676.14 ; 3389.69,3661.96 cw(c3409.74,3661.96) R34.1@3395.56,3676.14 ; 3389.69,3661.96 cw(c3409.74,3661.96) R34.1@3395.56,3676.14 ; 3391.58,2805.42 ccw(c3425.69,2839.52) R13.1@3425.69,2791.29 ; 3391.58,2805.42 ccw(c3425.69,2839.52) R13.1@3425.69,2791.29 ; 3391.58,2805.42 ccw(c3425.69,2839.52) R13.1@3425.69,2791.29 ; 3391.58,2805.42 ccw(c3425.69,2839.52) R13.1@3425.69,2791.29 ; 3508.96,3255.7 cw(c3543.83,3255.7) C25.2@3522,3282.89 ; 3508.96,3255.7 cw(c3543.83,3255.7) C25.2@3522,3282.89 ; 3508.96,3255.7 cw(c3543.83,3255.7) C25.2@3522,3282.89 ; 3508.96,3255.7 cw(c3543.83,3255.7) C25.2@3522,3282.89 ; 3508.96,3256.04 ccw(c3491.31,3256.04) 3501.53,3270.43 cw(c3491.31,3256.04) 3508.96,3256.04 ; 3508.96,3256.04 cw(c3526.61,3256.04) 3516.39,3270.43 ccw(c3526.61,3256.04) 3508.96,3256.04 ; C24.1@3546.61,3806.12 cw(c3604.88,3806.12) 3563.67,3847.33 ; C24.1@3546.61,3806.12 cw(c3604.88,3806.12) 3563.67,3847.33 ; C24.1@3546.61,3806.12 cw(c3604.88,3806.12) 3563.67,3847.33 ; 3546.61,3829.3 ccw(c3584,3829.3) C24.1@3557.56,3802.86 ; 3546.61,3829.3 ccw(c3584,3829.3) C24.1@3557.56,3802.86 ; 3546.61,3829.3 ccw(c3584,3829.3) C24.1@3557.56,3802.86 ; 3546.61,3829.3 ccw(c3584,3829.3) C24.1@3557.56,3802.86 ; 3546.61,3829.3 ccw(c3584,3829.3) C24.1@3557.56,3802.86 ; 3546.61,3845.59 ccw(c3556.59,3845.59) 3549.53,3838.53 ; 3546.61,3845.59 ccw(c3556.59,3845.59) 3549.53,3838.53 ; 3546.61,3845.59 ccw(c3556.59,3845.59) 3549.53,3838.53 ; 3546.61,3854.41 cw(c3556.59,3854.41) v1@3549.53,3861.47 ; 3546.61,3854.41 cw(c3556.59,3854.41) v1@3549.53,3861.47 ; 3546.61,3854.41 cw(c3556.59,3854.41) v1@3549.53,3861.47 ; 3546.61,3893.88 ccw(c3604.88,3893.88) 3563.67,3852.67 ; 3546.61,3893.88 ccw(c3604.88,3893.88) 3563.67,3852.67 ; 3546.61,3893.88 ccw(c3604.88,3893.88) 3563.67,3852.67 ; 3624.31,2627.04 ccw(c3644.37,2627.04) 3630.19,2612.86 cw(c3644.37,2627.04) 3624.31,2627.04 ; 3624.31,2627.04 cw(c3604.26,2627.04) 3618.44,2612.86 ccw(c3604.26,2627.04) 3624.31,2627.04 ; v1@3692.33,3407.33 cw(c3659.32,3374.32) U1.1@3706,3374.32 ; v1@3692.33,3407.33 cw(c3659.32,3374.32) U1.1@3706,3374.32 ; v1@3692.33,3407.33 cw(c3659.32,3374.32) U1.1@3706,3374.32 ; v1@3692.33,3407.33 cw(c3659.32,3374.32) U1.1@3706,3374.32 ; R1.1@3694.81,3266.86 ccw(c3667.8,3293.87) 3706,3293.87 ; R1.1@3694.81,3266.86 ccw(c3667.8,3293.87) 3706,3293.87 ; R1.1@3694.81,3266.86 ccw(c3667.8,3293.87) 3706,3293.87 ; R1.1@3694.81,3266.86 ccw(c3667.8,3293.87) 3706,3293.87 ; R1.1@3694.81,3266.86 ccw(c3667.8,3293.87) 3706,3293.87 ; R1.1@3695.82,3267.72 ccw(c3681.44,3287.63) 3706,3287.63 ; R1.1@3695.82,3267.72 ccw(c3681.44,3287.63) 3706,3287.63 ; R1.1@3695.82,3267.72 ccw(c3681.44,3287.63) 3706,3287.63 ; R1.1@3695.82,3267.72 ccw(c3681.44,3287.63) 3706,3287.63 ; R1.1@3695.82,3267.72 ccw(c3681.44,3287.63) 3706,3287.63 ; 3706,3287.63 U1.1@3706,3349 ; U1.9@3761.39,3429.67 cw(c3705.59,3346.2) U1.3@3806,3346.2 ; U1.9@3761.39,3429.67 cw(c3705.59,3346.2) U1.3@3806,3346.2 ; U1.9@3761.39,3429.67 cw(c3705.59,3346.2) U1.3@3806,3346.2 ; U1.9@3761.39,3429.67 cw(c3705.59,3346.2) U1.3@3806,3346.2 ; U1.9@3761.39,3429.67 cw(c3705.59,3346.2) U1.3@3806,3346.2 ; U1.9@3772.51,3446.3 cw(c3730.61,3383.63) 3806,3383.63 ; U1.9@3772.51,3446.3 cw(c3730.61,3383.63) 3806,3383.63 ; U1.9@3772.51,3446.3 cw(c3730.61,3383.63) 3806,3383.63 ; U1.9@3772.51,3446.3 cw(c3730.61,3383.63) 3806,3383.63 ; U1.9@3772.51,3446.3 cw(c3730.61,3383.63) 3806,3383.63 ; U1.9@3783.63,3462.93 cw(c3755.63,3421.06) U1.9@3806,3421.06 ; U1.9@3783.63,3462.93 cw(c3755.63,3421.06) U1.9@3806,3421.06 ; U1.9@3783.63,3462.93 cw(c3755.63,3421.06) U1.9@3806,3421.06 ; U1.9@3783.63,3462.93 cw(c3755.63,3421.06) U1.9@3806,3421.06 ; U1.9@3783.63,3462.93 cw(c3755.63,3421.06) U1.9@3806,3421.06 ; C6.1@3903.44,3268.86 ccw(c3889.26,3283.04) 3909.32,3283.04 ; C6.1@3903.44,3268.86 ccw(c3889.26,3283.04) 3909.32,3283.04 ; C6.1@3903.44,3268.86 ccw(c3889.26,3283.04) 3909.32,3283.04 ; C6.1@3903.44,3268.86 ccw(c3889.26,3283.04) 3909.32,3283.04 ; C6.1@3903.44,3268.86 ccw(c3889.26,3283.04) 3909.32,3283.04 ; 3909.32,3283.04 ccw(c3929.37,3283.04) C6.1@3915.19,3268.86 ; 3909.32,3283.04 ccw(c3929.37,3283.04) C6.1@3915.19,3268.86 ; 3909.32,3283.04 ccw(c3929.37,3283.04) C6.1@3915.19,3268.86 ; 3909.32,3283.04 ccw(c3929.37,3283.04) C6.1@3915.19,3268.86 ; 3909.32,3283.04 ccw(c3929.37,3283.04) C6.1@3915.19,3268.86 ; 3909.32,3370 ccw(c3954.18,3370) 3930.03,3332.19 cw(c3954.18,3370) 3909.32,3370 ; C22.1@3141.62,3217.98 cw(c3169.72,3217.98) 3149.85,3237.85 ccw(c3169.72,3217.98) C22.1@3141.62,3217.98 ; 3148.53,3236.53 cw(c3184,3201.05) 3184,3251.22 ccw(c3184,3201.05) 3148.53,3236.53 ; C22.1@3161.62,3217.98 cw(c3238.01,3217.98) 3184,3272 ccw(c3238.01,3217.98) C22.1@3161.62,3217.98 ; v1@3187.78,3255 cw(c3237.95,3255) 3202.47,3290.47 ccw(c3237.95,3255) v1@3187.78,3255 ; 3363.94,3867.94 cw(c3396,3835.88) 3396,3881.22 ccw(c3396,3835.88) 3363.94,3867.94 ; 3366.5,3870.5 cw(c3392.7,3844.3) 3395.69,3881.23 ccw(c3392.7,3844.3) 3366.5,3870.5 ; v1@3470.73,3561.61 cw(c3486.15,3564.13) 3473.46,3573.25 ccw(c3486.15,3564.13) v1@3470.73,3561.61 ; 3491.42,3598.23 ccw(c3478.17,3607.75) 3494.27,3610.39 cw(c3478.17,3607.75) 3491.42,3598.23 ; 3624.31,2631.62 cw(c3674.08,2631.62) 3638.89,2666.81 ccw(c3674.08,2631.62) 3624.31,2631.62 ; C6.1@3909.32,3274.77 cw(c3982.23,3274.77) 3930.67,3326.33 ccw(c3982.23,3274.77) C6.1@3909.32,3274.77 ; 3909.32,3323.05 cw(c3933.95,3323.05) 3916.53,3340.47 ccw(c3933.95,3323.05) 3909.32,3323.05 ; 3909.32,3333.5 ccw(c3930.87,3333.5) 3919.27,3315.33 cw(c3930.87,3333.5) 3909.32,3333.5
  Top Layer w23.62: C22.1@3146.72,3212.58 ccw(c3130.8,3228.5) 3153.32,3228.5 ; C22.1@3153.32,3217 3153.32,3243.32 ; 3351.42,3073.33 3376.4,3098.32 C2.1@3387,3098.32 ; Q2.2@3419.6,2708.21 3419.6,2775.91 R13.1@3425.69,2782 ; D1.1@3686,3092 3686,3163 ; 3688,3163 R1.1@3688,3265 ; U2.2@3328.98,3073.33 ccw(c3328.98,3127.49) 3367.28,3089.19 ; U2.2@3328.98,3073.33 ccw(c3328.98,3127.49) 3367.28,3089.19 ; U2.2@3328.98,3073.33 ccw(c3328.98,3127.49) 3367.28,3089.19 ; U2.2@3328.98,3073.33 ccw(c3328.98,3127.49) 3367.28,3089.19 ; U2.2@3328.98,3073.33 ccw(c3328.98,3127.49) 3367.28,3089.19 ; 3348.27,3070.19 cw(c3386.02,3032.44) C2.1@3386.02,3085.82 ; 3348.27,3070.19 cw(c3386.02,3032.44) C2.1@3386.02,3085.82 ; 3348.27,3070.19 cw(c3386.02,3032.44) C2.1@3386.02,3085.82 ; 3348.27,3070.19 cw(c3386.02,3032.44) C2.1@3386.02,3085.82 ; 3419.6,2750.64 cw(c3456.07,2750.64) R13.1@3430.28,2776.42 ; 3419.6,2750.64 cw(c3456.07,2750.64) R13.1@3430.28,2776.42 ; 3419.6,2750.64 cw(c3456.07,2750.64) R13.1@3430.28,2776.42 ; 3419.6,2750.64 cw(c3456.07,2750.64) R13.1@3430.28,2776.42 ; 3419.6,2750.64 cw(c3456.07,2750.64) R13.1@3430.28,2776.42 ; D1.1@3678.27,3094.66 ccw(c3659.61,3113.32) 3686,3113.32 ; D1.1@3678.27,3094.66 ccw(c3659.61,3113.32) 3686,3113.32 ; D1.1@3678.27,3094.66 ccw(c3659.61,3113.32) 3686,3113.32 ; 3686,3116.32 ccw(c3716.64,3116.32) D1.1@3694.97,3094.66 ; 3686,3116.32 ccw(c3716.64,3116.32) D1.1@3694.97,3094.66 ; 3686,3116.32 ccw(c3716.64,3116.32) D1.1@3694.97,3094.66 ; 3688,3212.71 cw(c3747,3212.71) R1.1@3705.28,3254.42 ; 3688,3212.71 cw(c3747,3212.71) R1.1@3705.28,3254.42 ; 3688,3212.71 cw(c3747,3212.71) R1.1@3705.28,3254.42 ; R1.1@3705.28,3254.42 ccw(c3725.27,3234.43) 3697,3234.43 cw(c3725.27,3234.43) R1.1@3705.28,3254.42 ; C22.1@3140.72,3212.58 ccw(c3110.32,3242.98) 3153.32,3242.98 cw(c3110.32,3242.98) C22.1@3140.72,3212.58
  Top Layer w25: 2661.56,3131.47 2696.81,3166.71 2712.7,3166.71 ; C4.1@3157,3000.68 3166.68,2991 v1(3212,2991)
  Top Layer w27.56: 3264.96,2969.96 3273,2969.96 3328.85,2969.96 Q7.2@3411.69,2887.12 3474.88,2887.12 v1(3535,2827) ; U2.2@3317.17,3073.33 3351.42,3073.33 ; Q5.2@3377.6,3639.21 Q5.2@3382.69,3644.3 ; C24.1@3534.68,3796 C24.1@3534.68,3803.68 ; U5.1@3539,3652.91 C24.1@3539,3794 ; D1.1@3682.62,3082.37 3682.62,3054.38 3703,3034 3707.77,3038.77 3731.23,3038.77 3763,3007 3826.6,3007 3836.7,2996.89 USB1.B12@3945.08,2860.76 ; U1.9@3812,3462 3945,3462 ; 4061.78,3055.42 USB1.A12@4114.89,2988.72 ; 3399.26,2899.55 cw(c3386.83,2887.12) Q7.2@3404.41,2887.12 ; 3399.26,2899.55 cw(c3386.83,2887.12) Q7.2@3404.41,2887.12 ; 3399.26,2899.55 cw(c3386.83,2887.12) Q7.2@3404.41,2887.12 ; 3539,3665.58 cw(c3598.28,3665.58) C26.2@3556.36,3707.49 ; 3539,3665.58 cw(c3598.28,3665.58) C26.2@3556.36,3707.49 ; 3539,3665.58 cw(c3598.28,3665.58) C26.2@3556.36,3707.49 ; 3539,3665.58 cw(c3598.28,3665.58) C26.2@3556.36,3707.49 ; 3539,3665.58 cw(c3598.28,3665.58) C26.2@3556.36,3707.49 ; 3539,3753.46 cw(c3593.24,3753.46) C24.1@3554.89,3791.81 ; 3539,3753.46 cw(c3593.24,3753.46) C24.1@3554.89,3791.81 ; 3539,3753.46 cw(c3593.24,3753.46) C24.1@3554.89,3791.81 ; 3539,3753.46 cw(c3593.24,3753.46) C24.1@3554.89,3791.81 ; 3539,3753.46 cw(c3593.24,3753.46) C24.1@3554.89,3791.81 ; 3539,3774.42 ccw(c3598.28,3774.42) C26.2@3556.36,3732.51 ; 3539,3774.42 ccw(c3598.28,3774.42) C26.2@3556.36,3732.51 ; 3539,3774.42 ccw(c3598.28,3774.42) C26.2@3556.36,3732.51 ; 3539,3774.42 ccw(c3598.28,3774.42) C26.2@3556.36,3732.51 ; 3539,3774.42 ccw(c3598.28,3774.42) C26.2@3556.36,3732.51 ; 3682.62,3054.05 cw(c3701.18,3054.05) D1.1@3691.67,3069.98 ; 3682.62,3054.05 cw(c3701.18,3054.05) D1.1@3691.67,3069.98 ; 3682.62,3054.05 cw(c3701.18,3054.05) D1.1@3691.67,3069.98 ; U1.9@3803.27,3436.73 cw(c3864.28,3375.72) 3864.28,3462 ; U1.9@3803.27,3436.73 cw(c3864.28,3375.72) 3864.28,3462 ; U1.9@3803.27,3436.73 cw(c3864.28,3375.72) 3864.28,3462 ; U1.9@3803.27,3436.73 cw(c3864.28,3375.72) 3864.28,3462 ; U1.9@3803.27,3436.73 cw(c3864.28,3375.72) 3864.28,3462 ; U1.9@3803.27,3481.27 ccw(c3849.8,3527.8) 3849.8,3462 ; U1.9@3803.27,3481.27 ccw(c3849.8,3527.8) 3849.8,3462 ; U1.9@3803.27,3481.27 ccw(c3849.8,3527.8) 3849.8,3462 ; U1.9@3803.27,3481.27 ccw(c3849.8,3527.8) 3849.8,3462 ; U1.9@3803.27,3481.27 ccw(c3849.8,3527.8) 3849.8,3462 ; v1(3885,3449) cw(c3916.38,3417.62) 3916.38,3462 ccw(c3916.38,3417.62) v1(3885,3449) ; v1(3885,3449) ccw(c3853.62,3417.62) 3853.62,3462 cw(c3853.62,3417.62) v1(3885,3449) ; C1.1@4057.81,3077.51 ccw(c4093.94,3073.4) 4065.5,3050.76 ; C1.1@4057.81,3077.51 ccw(c4093.94,3073.4) 4065.5,3050.76 ; C1.1@4057.81,3077.51 ccw(c4093.94,3073.4) 4065.5,3050.76
  Top Layer w39.37: 3693.03,3704.83 cw(c3700.29,3661.29) 3731.5,3692.5 ; v1@3697.18,3762.82 ccw(c3651.73,3808.27) 3716,3808.27 ; v1@3697.18,3771.18 cw(c3651.73,3725.73) 3716,3725.73 ; 3698.18,3694.82 ccw(c3655.14,3737.86) 3716,3737.86 ; 3716,3702.8 cw(c3763.2,3702.8) v1@3729.82,3736.18 ; 3716,3740.93 ccw(c3793.93,3740.93) v1@3738.82,3685.82 ; 3716,3761.2 ccw(c3763.2,3761.2) v1@3729.82,3727.82 ; 3722,3702 3716,3708 3716,3882 3777,3821 3984,3821 4013.9,3791.1 BAT.1@4013.9,3734.81 ; v1@3687.09,3732.52 cw(c3671.21,3690.64) 3716,3690.64 ; v1@3687.09,3732.52 cw(c3671.21,3690.64) 3716,3690.64 ; v1@3687.09,3732.52 cw(c3671.21,3690.64) 3716,3690.64 ; v1@3687.09,3732.52 cw(c3671.21,3690.64) 3716,3690.64 ; v1@3689.18,3722.82 ccw(c3624.42,3787.58) 3716,3787.58 ; v1@3689.18,3722.82 ccw(c3624.42,3787.58) 3716,3787.58 ; v1@3689.18,3722.82 ccw(c3624.42,3787.58) 3716,3787.58 ; v1@3689.18,3722.82 ccw(c3624.42,3787.58) 3716,3787.58 ; v1@3705.18,3757.82 ccw(c3679.04,3783.96) 3716,3783.96 ; v1@3705.18,3757.82 ccw(c3679.04,3783.96) 3716,3783.96 ; v1@3705.18,3757.82 ccw(c3679.04,3783.96) 3716,3783.96 ; v1@3705.18,3757.82 ccw(c3679.04,3783.96) 3716,3783.96 ; v1@3705.18,3766.18 cw(c3679.04,3740.04) 3716,3740.04 ; v1@3705.18,3766.18 cw(c3679.04,3740.04) 3716,3740.04 ; v1@3705.18,3766.18 cw(c3679.04,3740.04) 3716,3740.04 ; v1@3705.18,3766.18 cw(c3679.04,3740.04) 3716,3740.04 ; 3716,3696.76 cw(c3757.92,3696.76) v1@3737.06,3733.12 ; 3716,3696.76 cw(c3757.92,3696.76) v1@3737.06,3733.12 ; 3716,3696.76 cw(c3757.92,3696.76) v1@3737.06,3733.12 ; 3716,3696.76 cw(c3757.92,3696.76) v1@3737.06,3733.12 ; 3716,3771.68 ccw(c3783.68,3771.68) v1@3735.82,3723.82 ; 3716,3771.68 ccw(c3783.68,3771.68) v1@3735.82,3723.82 ; 3716,3771.68 ccw(c3783.68,3771.68) v1@3735.82,3723.82 ; 3716,3771.68 ccw(c3783.68,3771.68) v1@3735.82,3723.82 ; v1@3693.18,3866.18 cw(c3638.07,3811.07) 3716,3811.07 ccw(c3638.07,3811.07) v1@3693.18,3866.18
  Top Layer w45: USB1.7@3994.86,2711.62 USB1.7@4255.86,2907.62
  Bottom Layer w10: 2233,3520 2233,3593 2237,3597 ; v1(2858,3133) 2871.32,3119.68 ; K1.1@2871.32,3067.6 2871.32,3119.68 ; v1@2225.79,3551.79 cw(c2208.39,3534.39) 2233,3534.39 ; v1@2225.79,3551.79 cw(c2208.39,3534.39) 2233,3534.39 ; v1@2225.79,3551.79 cw(c2208.39,3534.39) 2233,3534.39 ; v1@2225.79,3564.21 ccw(c2208.39,3581.61) 2233,3581.61 ; v1@2225.79,3564.21 ccw(c2208.39,3581.61) 2233,3581.61 ; v1@2225.79,3564.21 ccw(c2208.39,3581.61) 2233,3581.61 ; 2233,3539.22 cw(c2250.78,3539.22) v1@2238.21,3551.79 ; 2233,3539.22 cw(c2250.78,3539.22) v1@2238.21,3551.79 ; 2233,3539.22 cw(c2250.78,3539.22) v1@2238.21,3551.79 ; 2233,3541.2 cw(c2211.8,3541.2) 2226.79,3526.21 ccw(c2211.8,3541.2) 2233,3541.2 ; 2233,3541.2 ccw(c2254.2,3541.2) 2239.21,3526.21 cw(c2254.2,3541.2) 2233,3541.2 ; 2233,3576.78 ccw(c2250.78,3576.78) v1@2238.21,3564.21 ; 2233,3576.78 ccw(c2250.78,3576.78) v1@2238.21,3564.21 ; 2233,3576.78 ccw(c2250.78,3576.78) v1@2238.21,3564.21 ; K1.1@2859.26,3096.1 ccw(c2842.24,3119.68) 2871.32,3119.68 ; K1.1@2859.26,3096.1 ccw(c2842.24,3119.68) 2871.32,3119.68 ; K1.1@2859.26,3096.1 ccw(c2842.24,3119.68) 2871.32,3119.68 ; K1.1@2859.26,3096.1 ccw(c2842.24,3119.68) 2871.32,3119.68 ; 2871.32,3119.68 ccw(c2900.4,3119.68) K1.1@2883.38,3096.1 ; 2871.32,3119.68 ccw(c2900.4,3119.68) K1.1@2883.38,3096.1 ; 2871.32,3119.68 ccw(c2900.4,3119.68) K1.1@2883.38,3096.1 ; 2871.32,3119.68 ccw(c2900.4,3119.68) K1.1@2883.38,3096.1
  Bottom Layer w15: 2286.23,3578 ccw(c2286.23,3593.33) Q3.2@2297.07,3582.49 ; Q3.2@2297.07,3576.39 cw(c2266.61,3545.93) 2309.69,3545.93 ; R20.1@2309.69,3526 2309.69,3585.12 2306.12,3588.69 2295.43,3578 2256,3578 2237,3597 2237,3963 2237,4006 ; v1@2222.56,3871.56 cw(c2187.7,3836.7) 2237,3836.7 ; v1@2222.56,3871.56 cw(c2187.7,3836.7) 2237,3836.7 ; v1@2222.56,3871.56 cw(c2187.7,3836.7) 2237,3836.7 ; v1@2222.56,3880.44 ccw(c2187.7,3915.3) 2237,3915.3 ; v1@2222.56,3880.44 ccw(c2187.7,3915.3) 2237,3915.3 ; v1@2222.56,3880.44 ccw(c2187.7,3915.3) 2237,3915.3 ; v1@2224.56,3792.56 cw(c2194.53,3762.53) 2237,3762.53 ; v1@2224.56,3792.56 cw(c2194.53,3762.53) 2237,3762.53 ; v1@2224.56,3792.56 cw(c2194.53,3762.53) 2237,3762.53 ; v1@2224.56,3801.44 ccw(c2194.53,3831.47) 2237,3831.47 ; v1@2224.56,3801.44 ccw(c2194.53,3831.47) 2237,3831.47 ; v1@2224.56,3801.44 ccw(c2194.53,3831.47) 2237,3831.47 ; v1@2226.56,3702.56 cw(c2201.35,3677.35) 2237,3677.35 ; v1@2226.56,3702.56 cw(c2201.35,3677.35) 2237,3677.35 ; v1@2226.56,3702.56 cw(c2201.35,3677.35) 2237,3677.35 ; v1@2226.56,3711.44 ccw(c2201.35,3736.65) 2237,3736.65 ; v1@2226.56,3711.44 ccw(c2201.35,3736.65) 2237,3736.65 ; v1@2226.56,3711.44 ccw(c2201.35,3736.65) 2237,3736.65 ; v1@2229.56,3628.56 cw(c2211.6,3610.6) 2237,3610.6 ; v1@2229.56,3628.56 cw(c2211.6,3610.6) 2237,3610.6 ; v1@2229.56,3628.56 cw(c2211.6,3610.6) 2237,3610.6 ; v1@2229.56,3637.44 ccw(c2211.6,3655.4) 2237,3655.4 ; v1@2229.56,3637.44 ccw(c2211.6,3655.4) 2237,3655.4 ; v1@2229.56,3637.44 ccw(c2211.6,3655.4) 2237,3655.4 ; 2237,4006 cw(c2186,4006) 2221.61,3969.49 ccw(c2186,4006) 2237,4006 ; Q3.2@2292.23,3578 ccw(c2292.23,3593.33) Q3.2@2303.07,3582.49 ; Q3.2@2292.23,3578 ccw(c2292.23,3593.33) Q3.2@2303.07,3582.49 ; Q3.2@2292.23,3578 ccw(c2292.23,3593.33) Q3.2@2303.07,3582.49 ; Q3.2@2292.23,3578 ccw(c2292.23,3593.33) Q3.2@2303.07,3582.49 ; R20.1@2302.04,3534.63 ccw(c2283.6,3553.07) 2309.69,3553.07 ; R20.1@2302.04,3534.63 ccw(c2283.6,3553.07) 2309.69,3553.07 ; R20.1@2302.04,3534.63 ccw(c2283.6,3553.07) 2309.69,3553.07 ; R20.1@2302.04,3534.63 ccw(c2283.6,3553.07) 2309.69,3553.07 ; R20.1@2302.04,3534.63 ccw(c2283.6,3553.07) 2309.69,3553.07 ; Q3.2@2303.07,3576.39 cw(c2287.1,3560.42) 2309.69,3560.42 ; Q3.2@2303.07,3576.39 cw(c2287.1,3560.42) 2309.69,3560.42 ; Q3.2@2303.07,3576.39 cw(c2287.1,3560.42) 2309.69,3560.42 ; Q3.2@2303.07,3576.39 cw(c2287.1,3560.42) 2309.69,3560.42 ; 2309.69,3553.07 ccw(c2335.78,3553.07) R20.1@2317.33,3534.63 ; 2309.69,3553.07 ccw(c2335.78,3553.07) R20.1@2317.33,3534.63 ; 2309.69,3553.07 ccw(c2335.78,3553.07) R20.1@2317.33,3534.63 ; 2309.69,3553.07 ccw(c2335.78,3553.07) R20.1@2317.33,3534.63 ; 2309.69,3553.07 ccw(c2335.78,3553.07) R20.1@2317.33,3534.63 ; v1@2221.56,3960.56 cw(c2184.28,3923.28) 2237,3923.28 ccw(c2184.28,3923.28) v1@2221.56,3960.56
  Bottom Layer w20: v1@2237,3963 2251,3977 ; C8.2@2290.69,3977 2251,3977 ; 2251,3977 cw(c2230.43,3997.57) 2226.51,3968.74 ccw(c2230.43,3997.57) 2251,3977 ; 2270.63,3977 cw(c2270.63,3956.94) C8.2@2284.81,3971.13 ; 2270.63,3977 ccw(c2270.63,3997.06) C8.2@2284.81,3982.87 ; 2270.63,3977 cw(c2270.63,3956.94) C8.2@2284.81,3971.13 ; 2270.63,3977 ccw(c2270.63,3997.06) C8.2@2284.81,3982.87 ; 2270.63,3977 ccw(c2270.63,3997.06) C8.2@2284.81,3982.87 ; 2270.63,3977 cw(c2270.63,3956.94) C8.2@2284.81,3971.13 ; 2270.63,3977 ccw(c2270.63,3997.06) C8.2@2284.81,3982.87 ; 2270.63,3977 cw(c2270.63,3956.94) C8.2@2284.81,3971.13
  Bottom Layer w25: v1(3212,2991) 3221.32,3000.32 C28.1@3221.32,3041
  Bottom Layer w27.56: 3877,3590 3885,3582 v1(3885,3449)
  Bottom Layer w50: 3848.79,2786.58 3936.84,2856.08 ; 3945.5,2676.4 4033.55,2745.91 ; 4121.45,2998.31 4209.5,3067.82 ; 4215.45,2877.96 4288.6,2935.7
  other v1: 2748.2,2451.8 2631.3,2459.6 2860,2470 2947,2471 3053,2474 3324,2476 2641.2,2502.2 2753.8,2511.7 2374.9,2516.1 3575,2534 2986,2543 2909.5,2546.5 3616,2553 3704,2571 2960,2584 3178,2591 3223,2591 2190,2608.82 2268.74,2608.82 2347.48,2608.82 3509.2,2615.7 3713,2645 3402,2653 3919,2664 2283.46,2677.17 2751,2682 2190,2687.56 2749,2745 2481,2747 2548,2747 2283.46,2755.91 3835,2760 2190,2766.3 2488,2833 2190,2845.04 2285,2845.04 2489,2922 2190,2923.78 2285,2923.78 3815,2966 2440.94,2992.13 2190,3002.52 2285,3002.52 4270,3017.01 2440.94,3070.87 2190,3081.26 2285,3081.26 2521,3101 2811,3133 2903,3133 4270,3135.12 2190,3160 2239,3160 2285,3160 2330,3160 2375,3160 2424,3160 2472,3160 2518,3160 2568,3160 2619,3160 2661,3160 2903,3182 2856.15,3183.91 2811,3185 3183,3211 2903,3231 2857,3232 2812,3233 3285,3246 2676,3250 4051,3250 2494,3251 2538,3251 2622,3251 4270,3253.23 2361,3254 2407,3254 2278,3255 3184,3255 2236,3256 3367,3262 3455,3266 3639,3276 2192,3282 2319,3284 4023,3288 4082,3288 3278,3298 3667,3313 2234,3324 3928,3329 2192,3360.74 4270,3371.34 2707,3372 2235,3398 3941,3399 3695,3410 3741,3413 3984,3430 2192,3439.48 3695,3449 3739,3449 2235,3476 3738,3483 3695,3484 2440,3486 4270,3489.45 3884,3492 3345,3511 2192,3518.22 3370,3534 3036,3540 2232,3558 3467,3561 3368,3568 3084,3572 3412,3591 3022,3593 2192,3596.96 4270,3607.56 3544,3610 3498,3611 2234,3633 3065,3636 3824,3636 4009,3656 4067,3656 3136,3658 3180,3658 2192,3675.7 3687,3686 3744,3686 3065,3699 3134,3702 3183,3702 2231,3707 4095,3715 4270,3725.67 3685,3727 3740,3728 2522,3736 2565,3736 2192,3754.44 3701,3762 2487,3763 4091,3774 2453,3787 2229,3797 2192,3833.18 4103,3834 2426,3840 4270,3843.78 4064,3851 3689,3862 3559,3870 2227,3876 3396,3885 3710,3898 4096,3898 3672,3899 3366,3907 2192,3911.92 4105,3961 4270,3961.89 2226,3965 3774,3976 4079,4001 2185,4015 3814,4021 3768,4023 4165.89,4080 4270,4080 2189,4090 2243,4091